# EAGLE board acs712_clone (EAGLE 7.2.0)
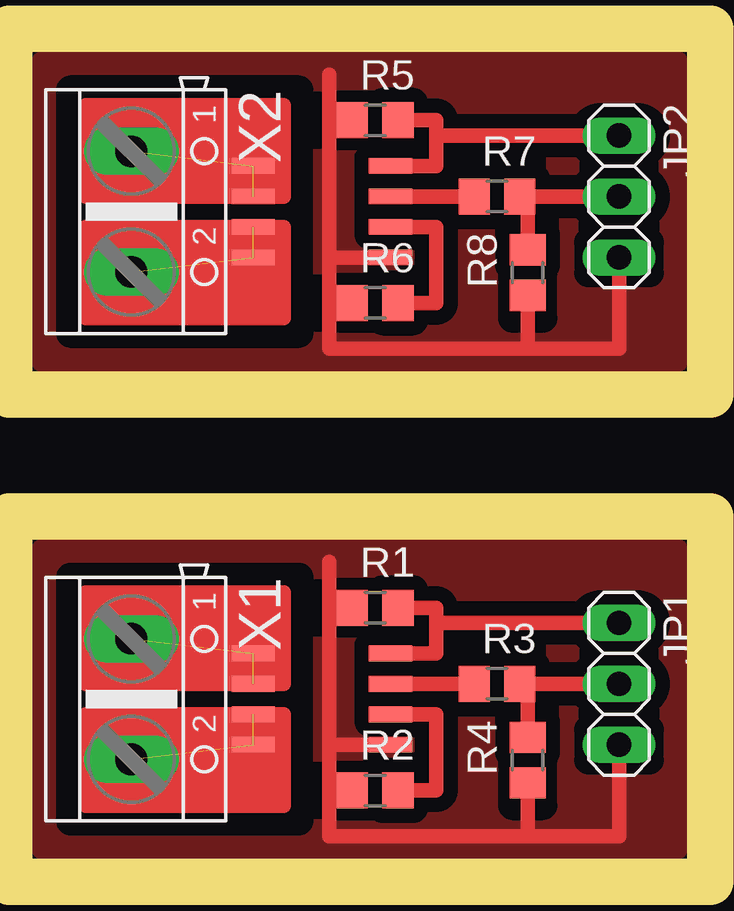
[diagram p0: board, top side]

No outline drawn. Coordinates in mm, seen from the top.
Copper layers (1*16): Top 0.035mm / dielectric 1.5mm / Bottom 0.035mm
Design rules "default": minimum track width 10mil, minimum drill 24mil, track to track 8mil, track to pad 8mil, pad to pad 8mil, via to via 8mil, smd to smd 8mil, copper to edge 40mil, drill to drill 8mil, minimum pad ring 10mil, minimum via ring 8mil, stop-mask expansion 4mil, vias tented up to drill 0mil, thermal gap 10mil
tRestrict: area 3.8,3.8 to 13.3,14; area 14.6,12.1 to 16.5,13.3; area 14.6,4.4 to 16.5,5.7; area 22.2,4.4 to 23.5,6.3; area 25.4,6.3 to 27.9,7.6; area 3.8,24.1 to 13.3,34.3; area 14.6,32.4 to 16.5,33.7; area 14.6,24.8 to 16.5,26; area 22.2,24.8 to 23.5,26.7; area 25.4,26.7 to 27.9,27.9
Milling: 8 lines

## Footprints (pad centres in the part's own frame; a part is rotated, then mirrored left to right if it is on the bottom)
1X03 = drill 1.016 long: 1 -2.54,0; 2 0,0; 3 2.54,0
R0805 = smd 1.3 x 1.5: 1 -0.95,0; 2 0.95,0
ACS712-0X = smd 1.8 x 0.65: P$1 1.27,4.445; P$2 1.27,3.175; P$3 1.27,1.905; P$4 1.27,0.635; P$5 6.985,0.635; P$6 6.985,1.905; P$7 6.985,3.175; P$8 6.985,4.445
AK500/2 = drill 1.321 long: 1 -2.515,0; 2 2.515,0

## Placement (x,y rotation side)
JP1  [1X03]  26.67,9.53 270 top
JP2  [1X03]  26.67,29.84 270 top
R1  [R0805]  16.51,12.7 0 top
R2  [R0805]  16.51,5.08 0 top
R3  [R0805]  21.59,9.53 0 top
R4  [R0805]  22.86,6.35 90 top
R5  [R0805]  16.51,33.02 0 top
R6  [R0805]  16.51,25.4 0 top
R7  [R0805]  21.59,29.84 0 top
R8  [R0805]  22.86,26.67 90 top
U$1  ACS712-0X  [ACS712-0X]  10.16,6.35 0 top
U$2  ACS712-0X  [ACS712-0X]  10.16,26.67 0 top
X1  [AK500/2]  6.35,8.89 270 top
X2  [AK500/2]  6.35,29.21 270 top

## Library data of the parts
JP1 JP2 = pinhead
R1-R8 = resistor
U$1 U$2 = Kao_lbr
X1 X2 = con-ptr500; OC_FARNELL: unknown; OC_NEWARK: unknown

## Nets
GND: JP1.3 R1.1 R2.1 R4.1 U$1.P$5
GND1: JP2.3 R5.1 R6.1 R8.1 U$2.P$5
IP+: U$1.P$1 U$1.P$2 X1.1
IP+1: U$2.P$1 U$2.P$2 X2.1
IP-: U$1.P$3 U$1.P$4 X1.2
IP-1: U$2.P$3 U$2.P$4 X2.2
N$3: JP1.1 R1.2 U$1.P$8
N$4: JP2.1 R5.2 U$2.P$8
N$5: R2.2 U$1.P$6
N$6: JP1.2 R3.2 R4.2
N$7: R3.1 U$1.P$7
N$8: R6.2 U$2.P$6
N$9: JP2.2 R7.2 R8.2
N$10: R7.1 U$2.P$7

## Tracks (layer width: path | path; a pad name or v marks a point on that pad's centre or on a via)
GND
  Top 0.61: 14.61,12.7 14.61,6.99 | 14.61,6.99 U$1.P$5 | R2.1 14.61,5.08 | 14.61,5.08 14.61,6.99 | R4.1 22.86,3.17 | 22.86,3.17 14.61,3.17 14.61,5.08 | JP1.3 26.67,3.17 22.86,3.17 | R1.1 14.61,12.7 | 14.61,12.7 14.61,14.61
  pour Top (isolate 0.6): 29.21,2.54 29.21,15.24 2.54,15.24 2.54,2.54
GND1
  Top 0.61: 14.61,33.02 14.61,27.3 | 14.61,27.3 U$2.P$5 | R6.1 14.61,25.4 | 14.61,25.4 14.61,27.3 | R8.1 22.86,23.5 | 22.86,23.5 14.61,23.5 14.61,25.4 | JP2.3 26.67,23.5 22.86,23.5 | R5.1 14.61,33.02 | 14.61,33.02 14.61,34.92
  pour Top (isolate 0.6): 29.21,22.86 29.21,35.56 2.54,35.56 2.54,22.86
IP+  (2 unrouted)
  pour Top (no thermals): 12.7,9.53 4.45,9.53 4.45,13.34 12.7,13.34
IP+1  (2 unrouted)
  pour Top (no thermals): 12.7,29.84 4.45,29.84 4.45,33.66 12.7,33.66
IP-  (2 unrouted)
  pour Top (no thermals): 12.7,8.26 4.45,8.26 4.45,4.45 12.7,4.45
IP-1  (2 unrouted)
  pour Top (no thermals): 12.7,28.57 4.45,28.57 4.45,24.77 12.7,24.77
N$1
  Top 0.61: 12.7,9.53 4.45,9.53 4.45,13.34 12.7,13.34 12.7,9.53
N$2
  Top 0.61: 12.7,8.26 12.7,4.45 4.45,4.45 4.45,8.26 12.7,8.26
N$3
  Top 0.61: R1.2 19.05,12.7 19.05,12.06 | 19.05,12.06 19.05,10.79 U$1.P$8 | JP1.1 19.05,12.06
N$4
  Top 0.61: R5.2 19.05,33.02 19.05,32.38 | 19.05,32.38 19.05,31.11 U$2.P$8 | JP2.1 19.05,32.38
N$5
  Top 0.61: U$1.P$6 19.05,8.26 19.05,5.08 R2.2
N$6
  Top 0.61: 22.86,9.53 R4.2 | R3.2 22.86,9.53 | 22.86,9.53 JP1.2
N$7
  Top 0.61: U$1.P$7 R3.1
N$8
  Top 0.61: U$2.P$6 19.05,28.57 19.05,25.4 R6.2
N$9
  Top 0.61: 22.86,29.84 R8.2 | R7.2 22.86,29.84 | 22.86,29.84 JP2.2
N$10
  Top 0.61: U$2.P$7 R7.1
N$11
  Top 0.61: 12.7,29.84 4.45,29.84 4.45,33.66 12.7,33.66 12.7,29.84
N$12
  Top 0.61: 12.7,28.57 12.7,24.77 4.45,24.77 4.45,28.57 12.7,28.57
(copper drawn outside any net)
  shapes: Top area x4